# Altium PCB Board.PcbDoc (part 1 of 3)
Units mm, origin at the board's own origin, x right, y up, seen from the top; angles counter-clockwise.
Board outline 220 x 125 mm, 2 copper layers (Top Layer, Bottom Layer); 325 components, 197 nets, 1030 pads, 170 vias.
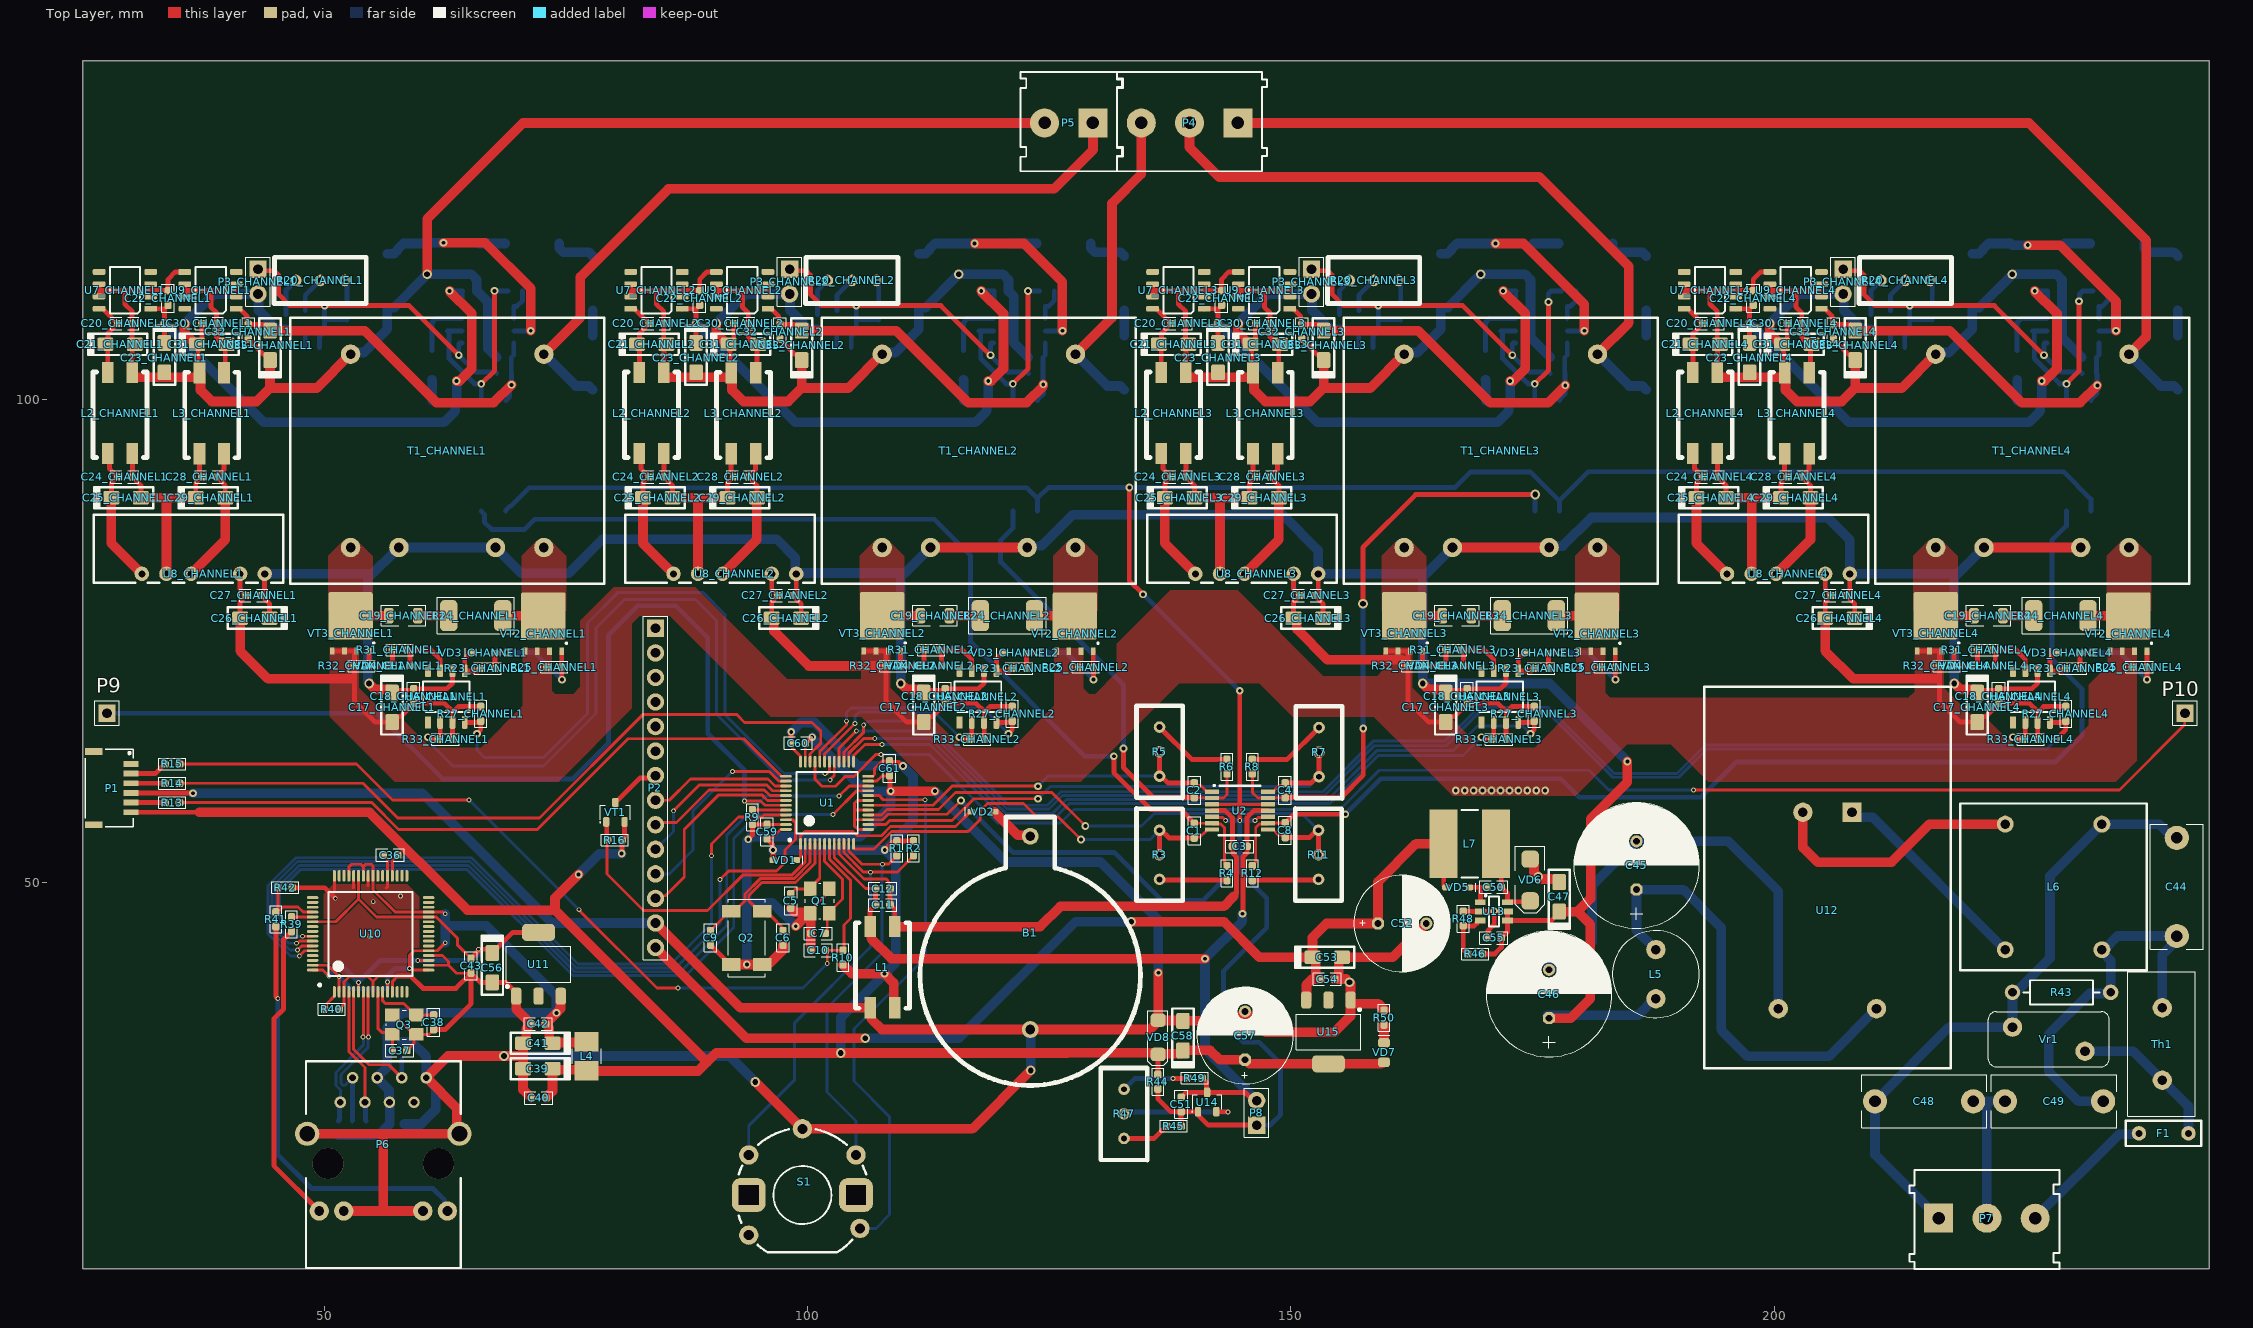
[diagram p0: Top Layer view]
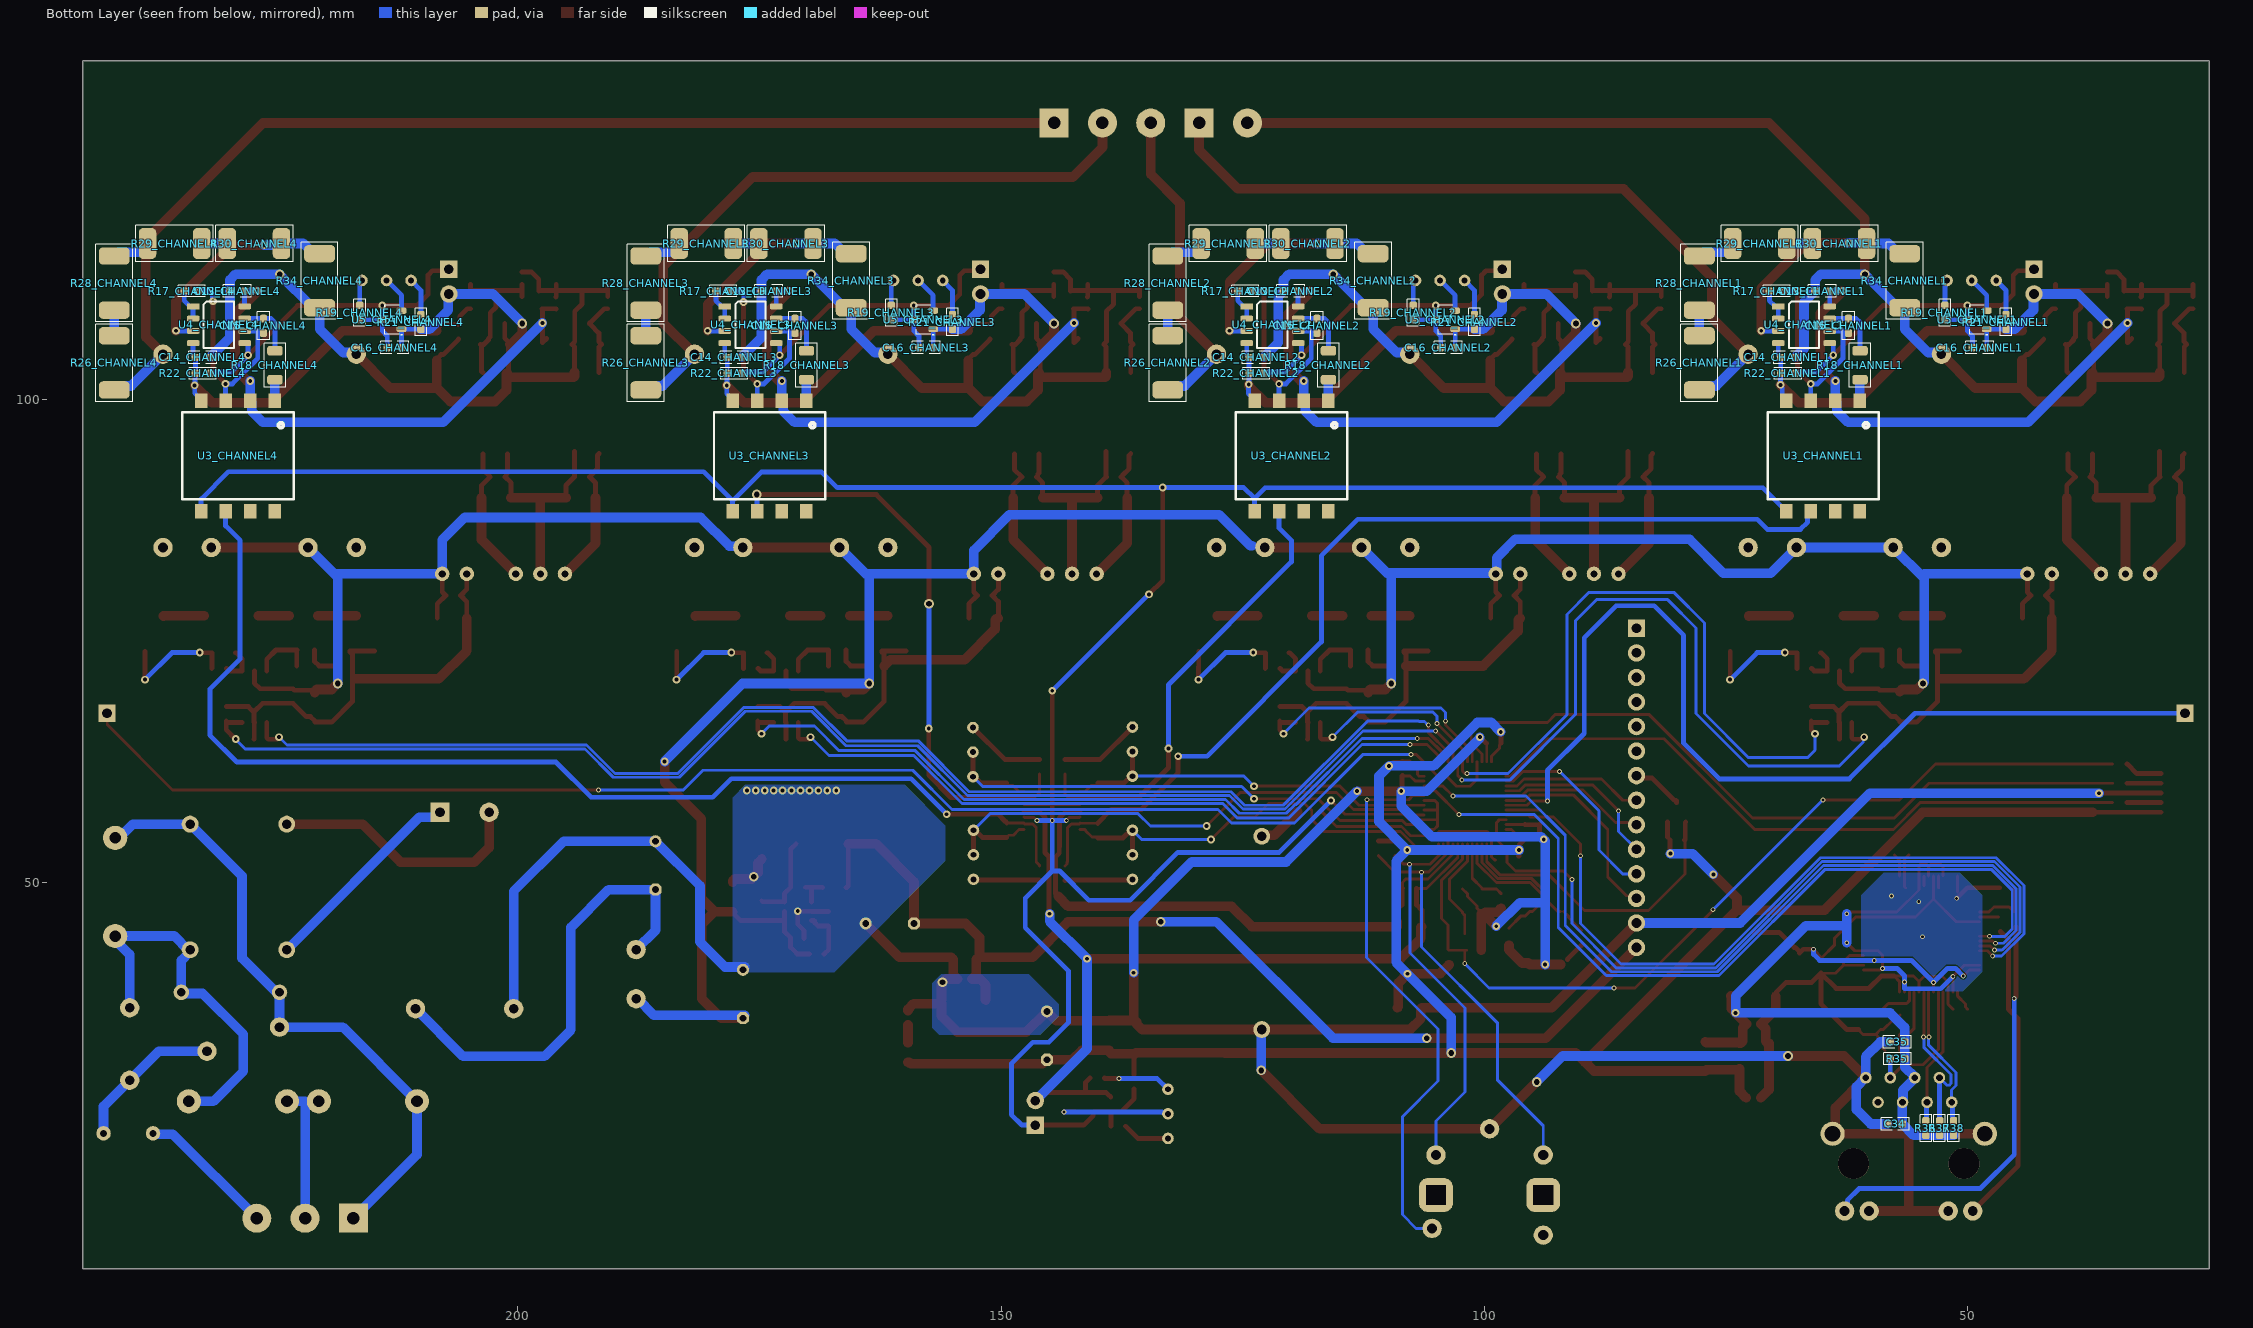
[diagram p1: Bottom Layer view, seen from below]
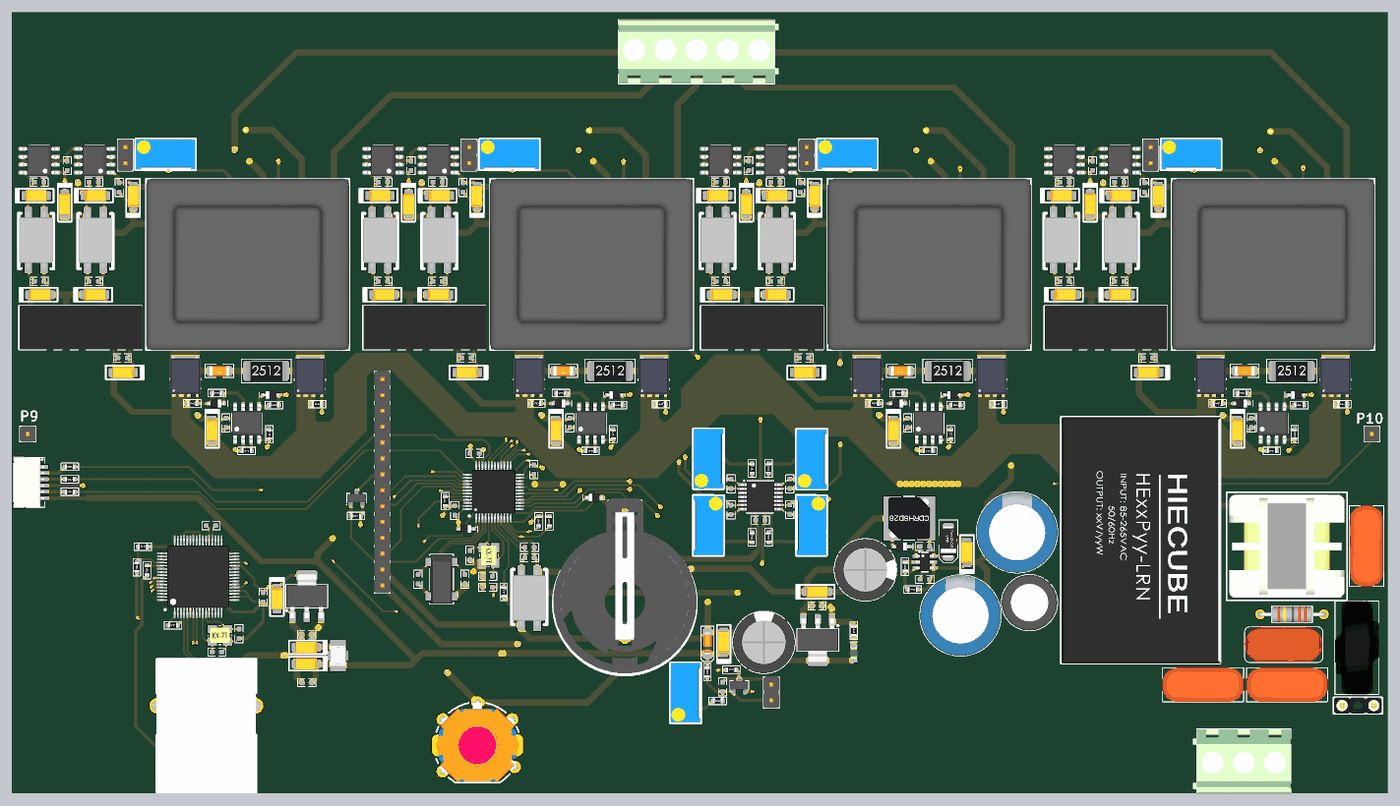
[diagram p4: 3D render of the assembled board from above, using the file's embedded part models]
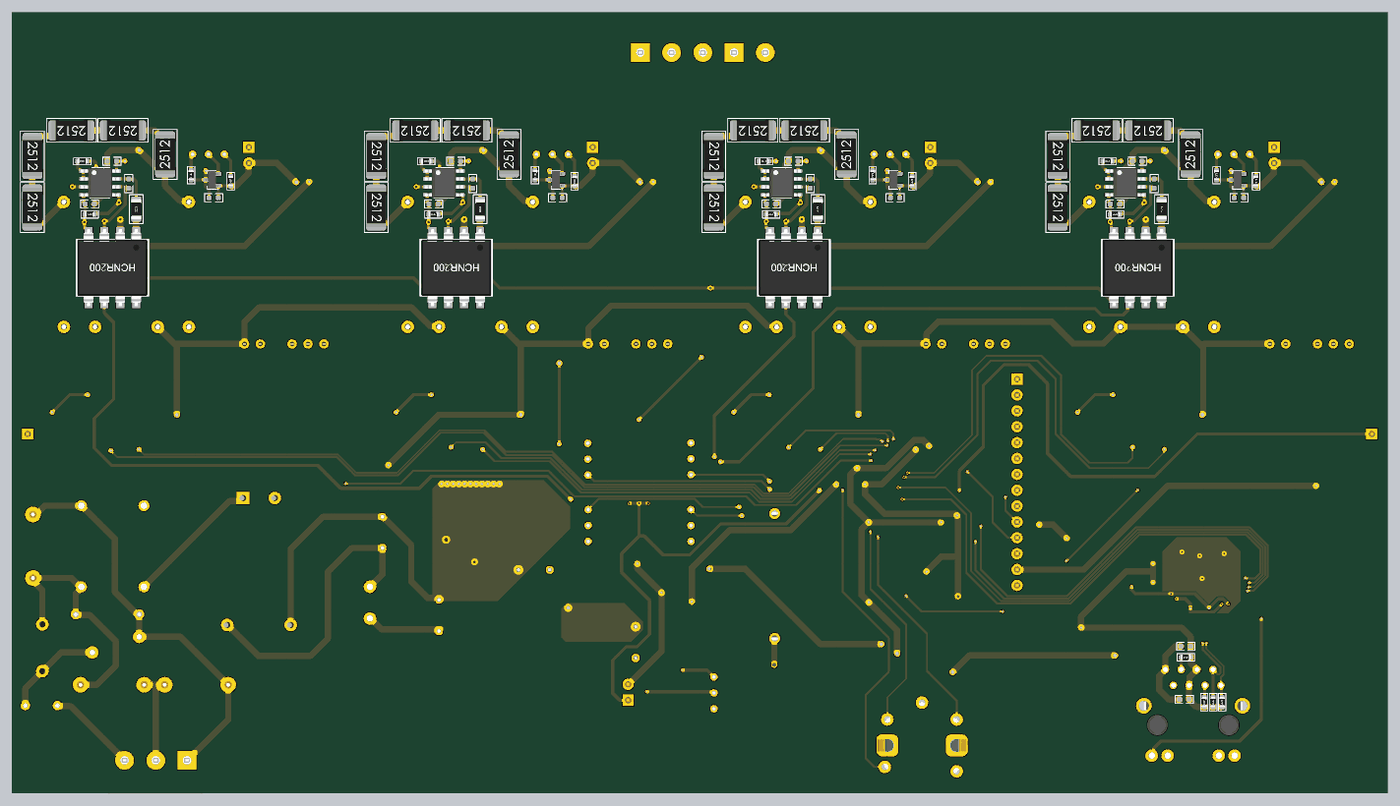
[diagram p5: 3D render of the assembled board from below, using the file's embedded part models]

## Layer stack, top to bottom
Top Solder: solder mask 0.0102, Solder Resist, Dk 3.5
Top Layer: signal copper 0.0356
Dielectric 1: dielectric 0.32, FR-4, Dk 4.8
Bottom Layer: signal copper 0.0356
Bottom Solder: solder mask 0.0102, Solder Resist, Dk 3.5

## Board outline
25,10 245,10 245,135 25,135

## Design rules (kind name [scope] priority, off if disabled: settings)
Clearance GND [InNet('GND_I.1')  Or InNet('GND_I.2') Or InNet('GND_I.3') Or InNet('GND_I.4') Or InNet('GND_I.5') Or InNet('GND_I.6') Or InNet('GND_I.7') Or InNet('GND_I.8') vs InNet('GND_I.1')  Or InNet('GND_I.2') Or InNet('GND_I.3') Or InNet('GND_I.4') Or InNet('GND_I.5') Or InNet('GND_I.6') Or InNet('GND_I.7') Or InNet('GND_I.8')] p1: gap=2 ignorepadtopadclearanceinfootprint=TRUE
Clearance GND_PWR [InNet('GND') or InNet('+5V') Or InNet('+3.3V') vs InNet('GND_I.1')  Or InNet('GND_I.2') Or InNet('GND_I.3') Or InNet('GND_I.4') Or InNet('GND_I.5') Or InNet('GND_I.6') Or InNet('GND_I.7') Or InNet('GND_I.8')] p2: gap=2 ignorepadtopadclearanceinfootprint=TRUE
Clearance [All] p3: gap=0.1 ignorepadtopadclearanceinfootprint=TRUE except(0.15: Arc-Fill Arc-Poly Arc-Region Track-Fill Track-Poly Track-Region SMDPad-Fill SMDPad-Poly SMDPad-Region THPad-Fill THPad-Poly THPad-Region Via-Fill Via-Poly Via-Region Fill-Fill Fill-Poly Fill-Region Poly-Poly Poly-Region Region-Region)
DiffPairsRouting [All] p1: maxlimit=0.3 minlimit=0.15 mostfreqgap=0.2 toplayer_minwidth=0.2 toplayer_maxwidth=0.5 toplayer_prefwidth=0.3 bottomlayer_minwidth=0.2 bottomlayer_maxwidth=0.5 bottomlayer_prefwidth=0.3 maxuncoupledlength=12.7
HoleSize [All] p1: absolutevalues=TRUE maxlimit=5 minlimit=0.025 maxpercent=80.000 minpercent=20.000
MinimumSolderMaskSliver [All] p1: minsoldermaskwidth=0.05
PolygonConnect PolygonConnect_PWR [IsVia] p1: connectstyle=Direct reliefconductorwidth=0.254 reliefentries=4 polygonreliefangle="90 Angle" airgapwidth=0.254
PolygonConnect [All] p2: connectstyle=Direct reliefconductorwidth=0.254 reliefentries=4 polygonreliefangle="90 Angle" airgapwidth=0.254
RoomDefinition CHANNEL2 [InComponentClass('CHANNEL2')] p1: confinementstyle=ConfineIn formatcopy=TRUE lockcomponents=FALSE outline 80,64 135,64 135,135 80,135
RoomDefinition CHANNEL3 [InComponentClass('CHANNEL3')] p2: confinementstyle=ConfineIn formatcopy=TRUE lockcomponents=FALSE outline 134,64 189,64 189,135 134,135
RoomDefinition CHANNEL4 [InComponentClass('CHANNEL4')] p3: confinementstyle=ConfineIn formatcopy=TRUE lockcomponents=FALSE outline 189,64 244,64 244,135 189,135
RoomDefinition CHANNEL1 [InComponentClass('CHANNEL1')] p4: confinementstyle=ConfineIn formatcopy=TRUE lockcomponents=FALSE outline 25,64 80,64 80,135 25,135
RoutingVias [All] p1: holewidth=0.4 width=0.8 viastyle="Through Hole" minholewidth=0.3 minwidth=0.5 maxholewidth=0.6 maxwidth=1
SilkToSilkClearance [All] p1: silktosilkclearance=0.1
SilkToSolderMaskClearance [IsPad] p1: minsilkscreentomaskgap=0.15 clearancetoexposedcopper=TRUE
SolderMaskExpansion [All] p1: expansion=0.15 istentingtop=FALSE
SupplyNets "Schematic Supply Nets_9" [InNet('+3.3_Eth')] p1: voltage=0.000
SupplyNets "Schematic Supply Nets_8" [InNet('+3.3V')] p2: voltage=0.000
SupplyNets "Schematic Supply Nets_7" [InNet('GND')] p3: voltage=0.000
SupplyNets "Schematic Supply Nets_6" [InNet('AVCC')] p4: voltage=0.000
SupplyNets "Schematic Supply Nets_5" [InNet('AGND')] p5: voltage=0.000
SupplyNets "Schematic Supply Nets_4" [InNet('+3.3_Bat')] p6: voltage=0.000
SupplyNets "Schematic Supply Nets_3" [InNet('+1.8_Eth')] p7: voltage=0.000
SupplyNets "Schematic Supply Nets_2" [InNet('+5V')] p8: voltage=0.000
SupplyNets "Schematic Supply Nets_1" [InNet('REF')] p9: voltage=0.000
SupplyNets "Schematic Supply Nets" [InNet('+12V')] p10: voltage=0.000
Width PWR [InNetClass('All Nets')] p1: maxlimit=1 minlimit=0.3 preferedwidth=0.5 minimp=50.000000 maximp=50.000000 favimp=50.000000
Width "High Voltage" [InNetClass('High Voltage')] p2: maxlimit=2 minlimit=0.5 preferedwidth=1 minimp=50.000000 maximp=50.000000 favimp=50.000000
Width [All] p3: maxlimit=0.5 minlimit=0.2 preferedwidth=0.3 minimp=50.000000 maximp=50.000000 favimp=50.000000
25 further rules are at their usual default settings.

## Classes and differential pairs
net class OUT[1..4]: OUT1 OUT2 OUT3 OUT4
channel class Channel: CHANNEL1 CHANNEL2 CHANNEL3 CHANNEL4
net class V[1..4]: V1 V2 V3 V4
net class U[1..4]: U1 U2 U3 U4
net class PWR: (+8V)_CHANNEL1 (+8V)_CHANNEL2 (+8V)_CHANNEL3 (+8V)_CHANNEL4 (-8V)_CHANNEL1 (-8V)_CHANNEL2 (-8V)_CHANNEL3 (-8V)_CHANNEL4 (GND)_CHANNEL1 (GND)_CHANNEL2 (GND)_CHANNEL3 (GND)_CHANNEL4 +1.8_Eth +3.3_Bat +3.3_Eth +3.3V +5V +12V AGND GND NetC19_CHANNEL1_1 NetC19_CHANNEL1_2 NetC19_CHANNEL2_1 NetC19_CHANNEL2_2 NetC19_CHANNEL3_1 NetC19_CHANNEL3_2 NetC19_CHANNEL4_1 NetC19_CHANNEL4_2 NetC20_CHANNEL1_2 NetC20_CHANNEL2_2 NetC20_CHANNEL3_2 NetC20_CHANNEL4_2 NetC24_CHANNEL1_1 NetC24_CHANNEL1_2 NetC24_CHANNEL2_1 NetC24_CHANNEL2_2 NetC24_CHANNEL3_1 NetC24_CHANNEL3_2 NetC24_CHANNEL4_1 NetC24_CHANNEL4_2 NetC28_CHANNEL1_1 NetC28_CHANNEL2_1 NetC28_CHANNEL3_1 NetC28_CHANNEL4_1 NetC30_CHANNEL1_1 NetC30_CHANNEL2_1 NetC30_CHANNEL3_1 NetC30_CHANNEL4_1 NetC45_1 NetC50_1 NetC50_2 NetR23_CHANNEL1_2 NetR23_CHANNEL2_2 NetR23_CHANNEL3_2 NetR23_CHANNEL4_2 NetR24_CHANNEL1_2 NetR24_CHANNEL2_2 NetR24_CHANNEL3_2 NetR24_CHANNEL4_2 NetR31_CHANNEL1_2 NetR31_CHANNEL2_2 NetR31_CHANNEL3_2 NetR31_CHANNEL4_2 NetR45_1 NetR46_1 NetR47_1 NetR47_2 NetR50_2 OUT1 OUT2 OUT3 OUT4 REF
net class PWM_RIGHT[1..4]: PWM_RIGHT1 PWM_RIGHT2 PWM_RIGHT3 PWM_RIGHT4
net class PWM_LEFT[1..4]: PWM_LEFT1 PWM_LEFT2 PWM_LEFT3 PWM_LEFT4
net class "High Voltage": NetC44_1 NetC44_2 NetC48_1 NetF1_1 NetF1_2 NetL6_3 NetL6_4
component class POWER: B1 C44 C45 C46 C47 C48 C49 C50 C51 C52 C53 C54 C55 C57 C58 F1 L5 L6 L7 P7 P8 R43 R44 R45 R46 R47 R48 R49 R50 Th1 U12 U13 U14 U15 VD5 VD6 VD7 VD8 Vr1
component class Main: C1 C2 C3 C4 C5 C6 C7 C8 C9 C10 C11 C12 C59 C60 C61 L1 P1 P2 P4 P5 P9 P10 Q1 Q2 R1 R2 R3 R4 R5 R6 R7 R8 R9 R10 R11 R12 R13 R14 R15 R16 S1 U1 U2 VD1 VD2 VT1
component class LAN: C34 C35 C36 C37 C38 C39 C40 C41 C42 C43 C56 L4 P6 Q3 R35 R36 R37 R38 R39 R40 R41 R42 U10 U11
component class CHANNEL4: C13_CHANNEL4 C14_CHANNEL4 C15_CHANNEL4 C16_CHANNEL4 C17_CHANNEL4 C18_CHANNEL4 C19_CHANNEL4 C20_CHANNEL4 C21_CHANNEL4 C22_CHANNEL4 C23_CHANNEL4 C24_CHANNEL4 C25_CHANNEL4 C26_CHANNEL4 C27_CHANNEL4 C28_CHANNEL4 C29_CHANNEL4 C30_CHANNEL4 C31_CHANNEL4 C32_CHANNEL4 C33_CHANNEL4 L2_CHANNEL4 L3_CHANNEL4 P3_CHANNEL4 R17_CHANNEL4 R18_CHANNEL4 R19_CHANNEL4 R20_CHANNEL4 R21_CHANNEL4 R22_CHANNEL4 R23_CHANNEL4 R24_CHANNEL4 R25_CHANNEL4 R26_CHANNEL4 R27_CHANNEL4 R28_CHANNEL4 R29_CHANNEL4 R30_CHANNEL4 R31_CHANNEL4 R32_CHANNEL4 R33_CHANNEL4 R34_CHANNEL4 T1_CHANNEL4 U3_CHANNEL4 U4_CHANNEL4 U5_CHANNEL4 U6_CHANNEL4 U7_CHANNEL4 U8_CHANNEL4 U9_CHANNEL4 VD3_CHANNEL4 VD4_CHANNEL4 VT2_CHANNEL4 VT3_CHANNEL4
component class CHANNEL3: C13_CHANNEL3 C14_CHANNEL3 C15_CHANNEL3 C16_CHANNEL3 C17_CHANNEL3 C18_CHANNEL3 C19_CHANNEL3 C20_CHANNEL3 C21_CHANNEL3 C22_CHANNEL3 C23_CHANNEL3 C24_CHANNEL3 C25_CHANNEL3 C26_CHANNEL3 C27_CHANNEL3 C28_CHANNEL3 C29_CHANNEL3 C30_CHANNEL3 C31_CHANNEL3 C32_CHANNEL3 C33_CHANNEL3 L2_CHANNEL3 L3_CHANNEL3 P3_CHANNEL3 R17_CHANNEL3 R18_CHANNEL3 R19_CHANNEL3 R20_CHANNEL3 R21_CHANNEL3 R22_CHANNEL3 R23_CHANNEL3 R24_CHANNEL3 R25_CHANNEL3 R26_CHANNEL3 R27_CHANNEL3 R28_CHANNEL3 R29_CHANNEL3 R30_CHANNEL3 R31_CHANNEL3 R32_CHANNEL3 R33_CHANNEL3 R34_CHANNEL3 T1_CHANNEL3 U3_CHANNEL3 U4_CHANNEL3 U5_CHANNEL3 U6_CHANNEL3 U7_CHANNEL3 U8_CHANNEL3 U9_CHANNEL3 VD3_CHANNEL3 VD4_CHANNEL3 VT2_CHANNEL3 VT3_CHANNEL3
component class CHANNEL2: C13_CHANNEL2 C14_CHANNEL2 C15_CHANNEL2 C16_CHANNEL2 C17_CHANNEL2 C18_CHANNEL2 C19_CHANNEL2 C20_CHANNEL2 C21_CHANNEL2 C22_CHANNEL2 C23_CHANNEL2 C24_CHANNEL2 C25_CHANNEL2 C26_CHANNEL2 C27_CHANNEL2 C28_CHANNEL2 C29_CHANNEL2 C30_CHANNEL2 C31_CHANNEL2 C32_CHANNEL2 C33_CHANNEL2 L2_CHANNEL2 L3_CHANNEL2 P3_CHANNEL2 R17_CHANNEL2 R18_CHANNEL2 R19_CHANNEL2 R20_CHANNEL2 R21_CHANNEL2 R22_CHANNEL2 R23_CHANNEL2 R24_CHANNEL2 R25_CHANNEL2 R26_CHANNEL2 R27_CHANNEL2 R28_CHANNEL2 R29_CHANNEL2 R30_CHANNEL2 R31_CHANNEL2 R32_CHANNEL2 R33_CHANNEL2 R34_CHANNEL2 T1_CHANNEL2 U3_CHANNEL2 U4_CHANNEL2 U5_CHANNEL2 U6_CHANNEL2 U7_CHANNEL2 U8_CHANNEL2 U9_CHANNEL2 VD3_CHANNEL2 VD4_CHANNEL2 VT2_CHANNEL2 VT3_CHANNEL2
component class CHANNEL1: C13_CHANNEL1 C14_CHANNEL1 C15_CHANNEL1 C16_CHANNEL1 C17_CHANNEL1 C18_CHANNEL1 C19_CHANNEL1 C20_CHANNEL1 C21_CHANNEL1 C22_CHANNEL1 C23_CHANNEL1 C24_CHANNEL1 C25_CHANNEL1 C26_CHANNEL1 C27_CHANNEL1 C28_CHANNEL1 C29_CHANNEL1 C30_CHANNEL1 C31_CHANNEL1 C32_CHANNEL1 C33_CHANNEL1 L2_CHANNEL1 L3_CHANNEL1 P3_CHANNEL1 R17_CHANNEL1 R18_CHANNEL1 R19_CHANNEL1 R20_CHANNEL1 R21_CHANNEL1 R22_CHANNEL1 R23_CHANNEL1 R24_CHANNEL1 R25_CHANNEL1 R26_CHANNEL1 R27_CHANNEL1 R28_CHANNEL1 R29_CHANNEL1 R30_CHANNEL1 R31_CHANNEL1 R32_CHANNEL1 R33_CHANNEL1 R34_CHANNEL1 T1_CHANNEL1 U3_CHANNEL1 U4_CHANNEL1 U5_CHANNEL1 U6_CHANNEL1 U7_CHANNEL1 U8_CHANNEL1 U9_CHANNEL1 VD3_CHANNEL1 VD4_CHANNEL1 VT2_CHANNEL1 VT3_CHANNEL1
differential pair TX: +TX_P -TX_N
differential pair RX: +RX_P -RX_N

## Components (designator, comment, footprint, x,y, rotation, side; value= is the part's Value field where it differs from the comment)
B1 "3.3V" BH810 123.025,54.775 r0 top
C1 "15p" C0603(1608) 140,55.35 r270 top
C2 "15p" C0603(1608) 140,59.525 r90 top
C3 "0.1u" C0603(1608) 144.7,53.725 r180 top
C4 "15p" C0603(1608) 149.4,59.525 r90 top
C5 "10p" C0603(1608) 98.25,48.075 r270 top
C6 "10p" C0603(1608) 97.45,44.25 r270 top
C7 "10p" C0603(1608) 101.075,44.725 r180 top
C8 "15p" C0603(1608) 149.4,55.4 r270 top
C9 "10p" C0603(1608) 89.95,44.25 r270 top
C10 "0.1u" C0603(1608) 101.075,42.975 r0 top
C11 "0.1u" C0603(1608) 107.775,47.675 r0 top
C12 "1u" C0603(1608) 107.775,49.35 r0 top
C13_CHANNEL1 "0.1u" C0603(1608) 65.024,111.172 r180 bottom (schematic designator C13)
C13_CHANNEL2 "0.1u" C0603(1608) 120.024,111.172 r180 bottom (schematic designator C13)
C13_CHANNEL3 "0.1u" C0603(1608) 174.024,111.172 r180 bottom (schematic designator C13)
C13_CHANNEL4 "0.1u" C0603(1608) 229.024,111.172 r180 bottom (schematic designator C13)
C14_CHANNEL1 "0.1u" C0603(1608) 68.58,104.314 r180 bottom (schematic designator C14)
C14_CHANNEL2 "0.1u" C0603(1608) 123.58,104.314 r180 bottom (schematic designator C14)
C14_CHANNEL3 "0.1u" C0603(1608) 177.58,104.314 r180 bottom (schematic designator C14)
C14_CHANNEL4 "0.1u" C0603(1608) 232.58,104.314 r180 bottom (schematic designator C14)
C15_CHANNEL1 "15p" C0603(1608) 62.317,107.577 r270 bottom (schematic designator C15)
C15_CHANNEL2 "15p" C0603(1608) 117.317,107.577 r270 bottom (schematic designator C15)
C15_CHANNEL3 "15p" C0603(1608) 171.317,107.577 r270 bottom (schematic designator C15)
C15_CHANNEL4 "15p" C0603(1608) 226.317,107.577 r270 bottom (schematic designator C15)
C16_CHANNEL1 "0.1u" C0603(1608) 48.75,105.325 r180 bottom (schematic designator C16)
C16_CHANNEL2 "0.1u" C0603(1608) 103.75,105.325 r180 bottom (schematic designator C16)
C16_CHANNEL3 "0.1u" C0603(1608) 157.75,105.325 r180 bottom (schematic designator C16)
C16_CHANNEL4 "0.1u" C0603(1608) 212.75,105.325 r180 bottom (schematic designator C16)
C17_CHANNEL1 "10u" "EL Case A (3216-18)" 57,68.1 r270 top (schematic designator C17)
C17_CHANNEL2 "10u" "EL Case A (3216-18)" 112,68.1 r270 top (schematic designator C17)
C17_CHANNEL3 "10u" "EL Case A (3216-18)" 166,68.1 r270 top (schematic designator C17)
C17_CHANNEL4 "10u" "EL Case A (3216-18)" 221,68.1 r270 top (schematic designator C17)
C18_CHANNEL1 "0.1u" C0603(1608) 59.225,69.275 r270 top (schematic designator C18)
C18_CHANNEL2 "0.1u" C0603(1608) 114.225,69.275 r270 top (schematic designator C18)
C18_CHANNEL3 "0.1u" C0603(1608) 168.225,69.275 r270 top (schematic designator C18)
C18_CHANNEL4 "0.1u" C0603(1608) 223.225,69.275 r270 top (schematic designator C18)
C19_CHANNEL1 "0.1u" C1206(3216) 58.166,77.597 r180 top (schematic designator C19)
C19_CHANNEL2 "0.1u" C1206(3216) 113.166,77.597 r180 top (schematic designator C19)
C19_CHANNEL3 "0.1u" C1206(3216) 167.166,77.597 r180 top (schematic designator C19)
C19_CHANNEL4 "0.1u" C1206(3216) 222.166,77.597 r180 top (schematic designator C19)
C20_CHANNEL1 "0.1u" C0603(1608) 29.353,107.823 r180 top (schematic designator C20)
C20_CHANNEL2 "0.1u" C0603(1608) 84.353,107.823 r180 top (schematic designator C20)
C20_CHANNEL3 "0.1u" C0603(1608) 138.353,107.823 r180 top (schematic designator C20)
C20_CHANNEL4 "0.1u" C0603(1608) 193.353,107.823 r180 top (schematic designator C20)
C21_CHANNEL1 "33u" "EL Case A (3216-18)" 28.853,105.664 r0 top (schematic designator C21)
C21_CHANNEL2 "33u" "EL Case A (3216-18)" 83.853,105.664 r0 top (schematic designator C21)
C21_CHANNEL3 "33u" "EL Case A (3216-18)" 137.853,105.664 r0 top (schematic designator C21)
C21_CHANNEL4 "33u" "EL Case A (3216-18)" 192.853,105.664 r0 top (schematic designator C21)
C22_CHANNEL1 "0.1u" C0603(1608) 33.825,110.45 r270 top (schematic designator C22)
C22_CHANNEL2 "0.1u" C0603(1608) 88.825,110.45 r270 top (schematic designator C22)
C22_CHANNEL3 "0.1u" C0603(1608) 142.825,110.45 r270 top (schematic designator C22)
C22_CHANNEL4 "0.1u" C0603(1608) 197.825,110.45 r270 top (schematic designator C22)
C23_CHANNEL1 "33u" "EL Case A (3216-18)" 33.45,104.3 r270 top (schematic designator C23)
C23_CHANNEL2 "33u" "EL Case A (3216-18)" 88.45,104.3 r270 top (schematic designator C23)
C23_CHANNEL3 "33u" "EL Case A (3216-18)" 142.45,104.3 r270 top (schematic designator C23)
C23_CHANNEL4 "33u" "EL Case A (3216-18)" 197.45,104.3 r270 top (schematic designator C23)
C24_CHANNEL1 "0.1u" C0603(1608) 29.353,91.948 r180 top (schematic designator C24)
C24_CHANNEL2 "0.1u" C0603(1608) 84.353,91.948 r180 top (schematic designator C24)
C24_CHANNEL3 "0.1u" C0603(1608) 138.353,91.948 r180 top (schematic designator C24)
C24_CHANNEL4 "0.1u" C0603(1608) 193.353,91.948 r180 top (schematic designator C24)
C25_CHANNEL1 "33u" "EL Case A (3216-18)" 29.48,89.789 r0 top (schematic designator C25)
C25_CHANNEL2 "33u" "EL Case A (3216-18)" 84.48,89.789 r0 top (schematic designator C25)
C25_CHANNEL3 "33u" "EL Case A (3216-18)" 138.48,89.789 r0 top (schematic designator C25)
C25_CHANNEL4 "33u" "EL Case A (3216-18)" 193.48,89.789 r0 top (schematic designator C25)
C26_CHANNEL1 "33u" "EL Case A (3216-18)" 42.799,77.343 r180 top (schematic designator C26)
C26_CHANNEL2 "33u" "EL Case A (3216-18)" 97.799,77.343 r180 top (schematic designator C26)
C26_CHANNEL3 "33u" "EL Case A (3216-18)" 151.799,77.343 r180 top (schematic designator C26)
C26_CHANNEL4 "33u" "EL Case A (3216-18)" 206.799,77.343 r180 top (schematic designator C26)
C27_CHANNEL1 "0.1u" C0603(1608) 42.678,79.681 r0 top (schematic designator C27)
C27_CHANNEL2 "0.1u" C0603(1608) 97.678,79.681 r0 top (schematic designator C27)
C27_CHANNEL3 "0.1u" C0603(1608) 151.678,79.681 r0 top (schematic designator C27)
C27_CHANNEL4 "0.1u" C0603(1608) 206.678,79.681 r0 top (schematic designator C27)
C28_CHANNEL1 "0.1u" C0603(1608) 38.092,91.948 r180 top (schematic designator C28)
C28_CHANNEL2 "0.1u" C0603(1608) 93.092,91.948 r180 top (schematic designator C28)
C28_CHANNEL3 "0.1u" C0603(1608) 147.092,91.948 r180 top (schematic designator C28)
C28_CHANNEL4 "0.1u" C0603(1608) 202.092,91.948 r180 top (schematic designator C28)
C29_CHANNEL1 "33u" "EL Case A (3216-18)" 38.219,89.789 r0 top (schematic designator C29)
C29_CHANNEL2 "33u" "EL Case A (3216-18)" 93.219,89.789 r0 top (schematic designator C29)
C29_CHANNEL3 "33u" "EL Case A (3216-18)" 147.219,89.789 r0 top (schematic designator C29)
C29_CHANNEL4 "33u" "EL Case A (3216-18)" 202.219,89.789 r0 top (schematic designator C29)
C30_CHANNEL1 "0.1u" C0603(1608) 38.092,107.823 r180 top (schematic designator C30)
C30_CHANNEL2 "0.1u" C0603(1608) 93.092,107.823 r180 top (schematic designator C30)
C30_CHANNEL3 "0.1u" C0603(1608) 147.092,107.823 r180 top (schematic designator C30)
C30_CHANNEL4 "0.1u" C0603(1608) 202.092,107.823 r180 top (schematic designator C30)
C31_CHANNEL1 "33u" "EL Case A (3216-18)" 38.342,105.664 r0 top (schematic designator C31)
C31_CHANNEL2 "33u" "EL Case A (3216-18)" 93.342,105.664 r0 top (schematic designator C31)
C31_CHANNEL3 "33u" "EL Case A (3216-18)" 147.342,105.664 r0 top (schematic designator C31)
C31_CHANNEL4 "33u" "EL Case A (3216-18)" 202.342,105.664 r0 top (schematic designator C31)
C32_CHANNEL1 "0.1u" C0603(1608) 42.125,106.975 r270 top (schematic designator C32)
C32_CHANNEL2 "0.1u" C0603(1608) 97.125,106.975 r270 top (schematic designator C32)
C32_CHANNEL3 "0.1u" C0603(1608) 151.125,106.975 r270 top (schematic designator C32)
C32_CHANNEL4 "0.1u" C0603(1608) 206.125,106.975 r270 top (schematic designator C32)
C33_CHANNEL1 "33u" "EL Case A (3216-18)" 44.375,105.55 r90 top (schematic designator C33)
C33_CHANNEL2 "33u" "EL Case A (3216-18)" 99.375,105.55 r90 top (schematic designator C33)
C33_CHANNEL3 "33u" "EL Case A (3216-18)" 153.375,105.55 r90 top (schematic designator C33)
C33_CHANNEL4 "33u" "EL Case A (3216-18)" 208.375,105.55 r90 top (schematic designator C33)
C34 "0.1u" C0603(1608) 57.5,25 r180 bottom
C35 "0.1u" C0603(1608) 57.25,33.5 r180 bottom
C36 "1u" C0603(1608) 56.825,52.825 r0 top
C37 "22p" C0603(1608) 57.775,32.6 r180 top
C38 "22p" C0603(1608) 61.3,35.525 r90 top
C39 "33u" "EL Case A (3216-18)" 72.075,30.725 r180 top
C40 "0.1u" C0603(1608) 72.15,27.7 r0 top
C41 "33u" "EL Case A (3216-18)" 72.075,33.35 r180 top
C42 "0.1u" C0603(1608) 72.125,35.35 r0 top
C43 "0.1u" C0603(1608) 65.175,41.375 r90 top
C44 "0.33u" "MER 13x5.5 h10 R10.16" 241.65,49.525 r270 top
C45 "2200u" El-d13-h25-F5-0.6 185.75,51.75 r270 top
C46 "2200u" El-d13-h25-F5-0.6 176.7,38.45 r270 top
C47 "100u" "EL Case A (3216-18)" 177.75,48.5 r90 top
C48 "2.2n" "MER 13x5.5 h10 R10.16" 215.5,27.35 r180 top
C49 "2.2n" "MER 13x5.5 h10 R10.16" 228.95,27.35 r0 top
C50 "0.1u" C0603(1608) 171,49.5 r0 top
C51 "0.1u" C0603(1608) 138.65,27.025 r270 top
C52 "1000u" El-d10-h16-F5-0.6 161.5,45.75 r180 top
C53 "10u" "EL Case A (3216-18)" 153.75,42.25 r0 top
C54 "1u" C0603(1608) 153.75,40 r0 top
C55 "1u" C0603(1608) 171,44.25 r180 top
C56 "33u" "EL Case A (3216-18)" 67.375,41.175 r270 top
C57 "1000u" El-d10-h16-F5-0.6 145.25,34.15 r270 top
C58 "10u" "EL Case A (3216-18)" 138.825,34.15 r90 top
C59 "0.1u" C0603(1608) 95.8,55.25 r270 top
C60 "0.1u" C0603(1608) 99,64.4 r180 top
C61 "0.1u" C0603(1608) 108.475,61.8 r90 top
F1 "1A" "562 Series" 240.275,24.025 r0 top
L1 "DR331-513AE" DR331 106.46,37.525 r90 top
L2_CHANNEL1 "DR331-513AE" DR331 30.123,102.261 r270 top (schematic designator L2)
L2_CHANNEL2 "DR331-513AE" DR331 85.123,102.261 r270 top (schematic designator L2)
L2_CHANNEL3 "DR331-513AE" DR331 139.123,102.261 r270 top (schematic designator L2)
L2_CHANNEL4 "DR331-513AE" DR331 194.123,102.261 r270 top (schematic designator L2)
L3_CHANNEL1 "DR331-513AE" DR331 39.612,102.235 r270 top (schematic designator L3)
L3_CHANNEL2 "DR331-513AE" DR331 94.612,102.235 r270 top (schematic designator L3)
L3_CHANNEL3 "DR331-513AE" DR331 148.612,102.235 r270 top (schematic designator L3)
L3_CHANNEL4 "DR331-513AE" DR331 203.612,102.235 r270 top (schematic designator L3)
L4 "10u" LQH32CN 77.125,32 r90 top
L5 "3.3u/2A" DR-CW8A 187.75,40.5 r270 top
L6 "PMCU-0330" PMCU-0330 228.9,49.525 r180 top
L7 "22u" CDRH6D28 168.5,54 r180 top
P1 "SM06B-SRSS-TB" SM06B-SRSS-TB 30,59.75 r90 top
P2 "PLS-14" PLS-14 84.25,59.77 r270 top
P3_CHANNEL1 "PLS-2" PLS-2 43.125,112.15 r270 top (schematic designator P3)
P3_CHANNEL2 "PLS-2" PLS-2 98.125,112.15 r270 top (schematic designator P3)
P3_CHANNEL3 "PLS-2" PLS-2 152.125,112.15 r270 top (schematic designator P3)
P3_CHANNEL4 "PLS-2" PLS-2 207.125,112.15 r270 top (schematic designator P3)
P4 "DG128-5.0-03P" DG128-5.0-03P 139.509,128.571 r180 top
P5 "DG128-5.0-02P" DG128-5.0-02P 127.009,128.571 r180 top
P6 "HR911105A" HR911105A 60.535,29.79 r180 top
P7 "DG128-5.0-03P" DG128-5.0-03P 222,15.25 r0 top
P8 "PLS-2" PLS-2 146.45,26.15 r90 top
P9 "PLS-1" PLS-1 27.5,67.5 r0 top
P10 "PLS-1" PLS-1 242.5,67.5 r0 top
Q1 "8MHz" KX-7T 101.25,48.075 r270 top
Q2 "32.768k" KX-327S 93.7,44.25 r270 top
Q3 "30 MHz" KX-7T 58.25,35.275 r0 top
R1 "10k" R0603 109.225,53.525 r90 top
R2 "10k" R0603 110.95,53.525 r90 top
R3 "50k" "T910W (3296W)" 136.4,52.85 r90 top
R4 "180k" R0603 143.375,50.95 r270 top
R5 "50k" "T910W (3296W)" 136.4,63.525 r270 top
R6 "180k" R0603 143.375,61.975 r90 top
R7 "50k" "T910W (3296W)" 152.9,63.475 r270 top
R8 "180k" R0603 146,61.975 r90 top
R9 "10k" R0603 94.275,56.75 r270 top
R10 "10k" R0603 103.65,42.225 r270 top
R11 "50k" "T910W (3296W)" 152.85,52.85 r90 top
R12 "180k" R0603 146,50.95 r270 top
R13 "22" R0603 34.25,58.25 r0 top
R14 "22" R0603 34.25,60.25 r0 top
R15 "22" R0603 34.25,62.25 r0 top
R16 "10k" R0603 80.025,54.375 r0 top
R17_CHANNEL1 "180k" R0603 69.75,111.172 r180 bottom (schematic designator R17)
R17_CHANNEL2 "180k" R0603 124.75,111.172 r180 bottom (schematic designator R17)
R17_CHANNEL3 "180k" R0603 178.75,111.172 r180 bottom (schematic designator R17)
R17_CHANNEL4 "180k" R0603 233.75,111.172 r180 bottom (schematic designator R17)
R18_CHANNEL1 "680" R1206 61.125,103.5 r270 bottom (schematic designator R18)
R18_CHANNEL2 "680" R1206 116.125,103.5 r270 bottom (schematic designator R18)
R18_CHANNEL3 "680" R1206 170.125,103.5 r270 bottom (schematic designator R18)
R18_CHANNEL4 "680" R1206 225.125,103.5 r270 bottom (schematic designator R18)
R19_CHANNEL1 "120k" R0603 52.35,108.95 r270 bottom (schematic designator R19)
R19_CHANNEL2 "120k" R0603 107.35,108.95 r270 bottom (schematic designator R19)
R19_CHANNEL3 "120k" R0603 161.35,108.95 r270 bottom (schematic designator R19)
R19_CHANNEL4 "120k" R0603 216.35,108.95 r270 bottom (schematic designator R19)
R20_CHANNEL1 "50k" "T910W (3296W)" 49.575,112.275 r180 top (schematic designator R20)
R20_CHANNEL2 "50k" "T910W (3296W)" 104.575,112.275 r180 top (schematic designator R20)
R20_CHANNEL3 "50k" "T910W (3296W)" 158.575,112.275 r180 top (schematic designator R20)
R20_CHANNEL4 "50k" "T910W (3296W)" 213.575,112.275 r180 top (schematic designator R20)
R21_CHANNEL1 "120k" R0603 46.025,107.975 r90 bottom (schematic designator R21)
R21_CHANNEL2 "120k" R0603 101.025,107.975 r90 bottom (schematic designator R21)
R21_CHANNEL3 "120k" R0603 155.025,107.975 r90 bottom (schematic designator R21)
R21_CHANNEL4 "120k" R0603 210.025,107.975 r90 bottom (schematic designator R21)
R22_CHANNEL1 "100" R0603 68.58,102.663 r0 bottom (schematic designator R22)
R22_CHANNEL2 "100" R0603 123.58,102.663 r0 bottom (schematic designator R22)
R22_CHANNEL3 "100" R0603 177.58,102.663 r0 bottom (schematic designator R22)
R22_CHANNEL4 "100" R0603 232.58,102.663 r0 bottom (schematic designator R22)
R23_CHANNEL1 "10" R0603 66.907,72.131 r0 top (schematic designator R23)
R23_CHANNEL2 "10" R0603 121.907,72.131 r0 top (schematic designator R23)
R23_CHANNEL3 "10" R0603 175.907,72.131 r0 top (schematic designator R23)
R23_CHANNEL4 "10" R0603 230.907,72.131 r0 top (schematic designator R23)
R24_CHANNEL1 "56" R2512 65.659,77.597 r0 top (schematic designator R24)
R24_CHANNEL2 "56" R2512 120.659,77.597 r0 top (schematic designator R24)
R24_CHANNEL3 "56" R2512 174.659,77.597 r0 top (schematic designator R24)
R24_CHANNEL4 "56" R2512 229.659,77.597 r0 top (schematic designator R24)
R25_CHANNEL1 "10k" R0603 73.787,72.263 r0 top (schematic designator R25)
R25_CHANNEL2 "10k" R0603 128.787,72.263 r0 top (schematic designator R25)
R25_CHANNEL3 "10k" R0603 182.787,72.263 r0 top (schematic designator R25)
R25_CHANNEL4 "10k" R0603 237.787,72.263 r0 top (schematic designator R25)
R26_CHANNEL1 "2.7M" R2512 77.75,103.75 r270 bottom (schematic designator R26)
R26_CHANNEL2 "2.7M" R2512 132.75,103.75 r270 bottom (schematic designator R26)
R26_CHANNEL3 "2.7M" R2512 186.75,103.75 r270 bottom (schematic designator R26)
R26_CHANNEL4 "2.7M" R2512 241.75,103.75 r270 bottom (schematic designator R26)
R27_CHANNEL1 "150k" R0603 66.167,67.437 r90 top (schematic designator R27)
R27_CHANNEL2 "150k" R0603 121.167,67.437 r90 top (schematic designator R27)
R27_CHANNEL3 "150k" R0603 175.167,67.437 r90 top (schematic designator R27)
R27_CHANNEL4 "150k" R0603 230.167,67.437 r90 top (schematic designator R27)
R28_CHANNEL1 "2.7M" R2512 77.75,112 r270 bottom (schematic designator R28)
R28_CHANNEL2 "2.7M" R2512 132.75,112 r270 bottom (schematic designator R28)
R28_CHANNEL3 "2.7M" R2512 186.75,112 r270 bottom (schematic designator R28)
R28_CHANNEL4 "2.7M" R2512 241.75,112 r270 bottom (schematic designator R28)
R29_CHANNEL1 "2.7M" R2512 71.5,116.098 r0 bottom (schematic designator R29)
R29_CHANNEL2 "2.7M" R2512 126.5,116.098 r0 bottom (schematic designator R29)
R29_CHANNEL3 "2.7M" R2512 180.5,116.098 r0 bottom (schematic designator R29)
R29_CHANNEL4 "2.7M" R2512 235.5,116.098 r0 bottom (schematic designator R29)
R30_CHANNEL1 "2.7M" R2512 63.25,116.098 r0 bottom (schematic designator R30)
R30_CHANNEL2 "2.7M" R2512 118.25,116.098 r0 bottom (schematic designator R30)
R30_CHANNEL3 "2.7M" R2512 172.25,116.098 r0 bottom (schematic designator R30)
R30_CHANNEL4 "2.7M" R2512 227.25,116.098 r0 bottom (schematic designator R30)
R31_CHANNEL1 "10" R0603 57.785,74.041 r180 top (schematic designator R31)
R31_CHANNEL2 "10" R0603 112.785,74.041 r180 top (schematic designator R31)
R31_CHANNEL3 "10" R0603 166.785,74.041 r180 top (schematic designator R31)
R31_CHANNEL4 "10" R0603 221.785,74.041 r180 top (schematic designator R31)
R32_CHANNEL1 "10k" R0603 53.848,72.39 r0 top (schematic designator R32)
R32_CHANNEL2 "10k" R0603 108.848,72.39 r0 top (schematic designator R32)
R32_CHANNEL3 "10k" R0603 162.848,72.39 r0 top (schematic designator R32)
R32_CHANNEL4 "10k" R0603 217.848,72.39 r0 top (schematic designator R32)
R33_CHANNEL1 "150k" R0603 62.525,64.8 r0 top (schematic designator R33)
R33_CHANNEL2 "150k" R0603 117.525,64.8 r0 top (schematic designator R33)
R33_CHANNEL3 "150k" R0603 171.525,64.8 r0 top (schematic designator R33)
R33_CHANNEL4 "150k" R0603 226.525,64.8 r0 top (schematic designator R33)
R34_CHANNEL1 "90.9k" R2512 56.5,112.25 r90 bottom (schematic designator R34)
R34_CHANNEL2 "90.9k" R2512 111.5,112.25 r90 bottom (schematic designator R34)
R34_CHANNEL3 "90.9k" R2512 165.5,112.25 r90 bottom (schematic designator R34)
R34_CHANNEL4 "90.9k" R2512 220.5,112.25 r90 bottom (schematic designator R34)
R35 "49.9" R0603 57.25,31.75 r180 bottom
R36 "49.9" R0603 54.317,24.575 r270 bottom
R37 "49.9" R0603 52.883,24.575 r270 bottom
R38 "49.9" R0603 51.45,24.575 r270 bottom
R39 "680" R0603 46.6,45.675 r270 top
R40 "18k" R0603 50.75,36.875 r0 top
R41 "680" R0603 44.975,46.175 r270 top
R42 "10k" R0603 45.925,49.45 r180 top
R43 "1M/1W" RES1016-650X250 229.725,38.625 r0 top
R44 "1k" R0603 136.225,29.375 r90 top
R45 "120k" R0603 137.875,24.775 r0 top
R46 "51k" R0603 169.05,42.6 r0 top
R47 "50k" "T910W (3296W)" 132.725,26.05 r270 top
R48 "10k" R0603 167.825,46.25 r270 top
R49 "120k" R0603 140.05,29.75 r180 top
R50 "10k" R0603 159.625,36 r270 top
S1 "EC12D" EC12D 99.45,17.65 r0 top
T1_CHANNEL1 "EI 302 2027" "EI 302 2027" 62.705,94.648 r270 top (schematic designator T1)
T1_CHANNEL2 "EI 302 2027" "EI 302 2027" 117.705,94.648 r270 top (schematic designator T1)
T1_CHANNEL3 "EI 302 2027" "EI 302 2027" 171.705,94.648 r270 top (schematic designator T1)
T1_CHANNEL4 "EI 302 2027" "EI 302 2027" 226.705,94.648 r270 top (schematic designator T1)
Th1 "" "TH D13 7.5b" 240.15,33.275 r90 top
U1 "STM32F334Сx" LQFP48 102,58.225 r90 top
U2 "MCP6004" TSSOP-14 141.825,59.375 r0 top
U3_CHANNEL1 "HCNR201" HCNR201 61.145,99.839 r270 bottom (schematic designator U3)
U3_CHANNEL2 "HCNR201" HCNR201 116.145,99.839 r270 bottom (schematic designator U3)
U3_CHANNEL3 "HCNR201" HCNR201 170.145,99.839 r270 bottom (schematic designator U3)
U3_CHANNEL4 "HCNR201" HCNR201 225.145,99.839 r270 bottom (schematic designator U3)
U4_CHANNEL1 "TL072" SO8-150 66.917,107.692 r270 bottom (schematic designator U4)
U4_CHANNEL2 "TL072" SO8-150 121.917,107.692 r270 bottom (schematic designator U4)
U4_CHANNEL3 "TL072" SO8-150 175.917,107.692 r270 bottom (schematic designator U4)
U4_CHANNEL4 "TL072" SO8-150 230.917,107.692 r270 bottom (schematic designator U4)
U5_CHANNEL1 "TL431" SOT23 49.022,108.204 r90 bottom (schematic designator U5)
U5_CHANNEL2 "TL431" SOT23 104.022,108.204 r90 bottom (schematic designator U5)
U5_CHANNEL3 "TL431" SOT23 158.022,108.204 r90 bottom (schematic designator U5)
U5_CHANNEL4 "TL431" SOT23 213.022,108.204 r90 bottom (schematic designator U5)
U6_CHANNEL1 "IR4427S" SO8-150 62.611,69.215 r0 top (schematic designator U6)
U6_CHANNEL2 "IR4427S" SO8-150 117.611,69.215 r0 top (schematic designator U6)
U6_CHANNEL3 "IR4427S" SO8-150 171.611,69.215 r0 top (schematic designator U6)
U6_CHANNEL4 "IR4427S" SO8-150 226.611,69.215 r0 top (schematic designator U6)
U7_CHANNEL1 "L78L08" SO8-150 29.353,111.252 r90 top (schematic designator U7)
U7_CHANNEL2 "L78L08" SO8-150 84.353,111.252 r90 top (schematic designator U7)
U7_CHANNEL3 "L78L08" SO8-150 138.353,111.252 r90 top (schematic designator U7)
U7_CHANNEL4 "L78L08" SO8-150 193.353,111.252 r90 top (schematic designator U7)
U8_CHANNEL1 "A1212S-2W" AxxyyS-2W 43.815,81.915 r180 top (schematic designator U8)
U8_CHANNEL2 "A1212S-2W" AxxyyS-2W 98.815,81.915 r180 top (schematic designator U8)
U8_CHANNEL3 "A1212S-2W" AxxyyS-2W 152.815,81.915 r180 top (schematic designator U8)
U8_CHANNEL4 "A1212S-2W" AxxyyS-2W 207.815,81.915 r180 top (schematic designator U8)
U9_CHANNEL1 "L79L08" SO8-150 38.219,111.252 r90 top (schematic designator U9)
U9_CHANNEL2 "L79L08" SO8-150 93.219,111.252 r90 top (schematic designator U9)
U9_CHANNEL3 "L79L08" SO8-150 147.219,111.252 r90 top (schematic designator U9)
U9_CHANNEL4 "L79L08" SO8-150 202.219,111.252 r90 top (schematic designator U9)
U10 "CH9121" LQFP64 54.775,44.675 r90 top
U11 "LD1117-1.8V" SOT223 72.15,41.525 r0 top value=1.8V
U12 "HE12P24-LNR" HExxPyy-LRN 205.5,50.5 r270 top
U13 "MCP16301/H" SOT23-6 171,47 r0 top
U14 "TL431" SOT23 141.325,27.275 r0 top
U15 "LD1117-3.3V" SOT223 153.875,34.525 r180 top value=3.3V
VD1 "BAT54WS" SOD323 97.625,52.3 r0 top
VD2 "BAT54WS" SOD323 118.125,57.3 r180 top
VD3_CHANNEL1 "1N4148WS" SOD323 66.425,73.75 r180 top (schematic designator VD3)
VD3_CHANNEL2 "1N4148WS" SOD323 121.425,73.75 r180 top (schematic designator VD3)
VD3_CHANNEL3 "1N4148WS" SOD323 175.425,73.75 r180 top (schematic designator VD3)
VD3_CHANNEL4 "1N4148WS" SOD323 230.425,73.75 r180 top (schematic designator VD3)
VD4_CHANNEL1 "1N4148WS" SOD323 57.658,72.39 r0 top (schematic designator VD4)
VD4_CHANNEL2 "1N4148WS" SOD323 112.658,72.39 r0 top (schematic designator VD4)
VD4_CHANNEL3 "1N4148WS" SOD323 166.658,72.39 r0 top (schematic designator VD4)
VD4_CHANNEL4 "1N4148WS" SOD323 221.658,72.39 r0 top (schematic designator VD4)
VD5 "1N4148WS" SOD323 167.25,49.475 r0 top
VD6 "SS16" "DO-214AC (SMA)" 174.75,50.25 r270 top
VD7 "LED" SMD_0805_GREEN 159.625,32.4 r90 top
VD8 "BZV55-3.6V" SOD80C 136.25,33.975 r270 top
Vr1 "*" VAR-10K-5.6 228.4,33.775 r0 top
VT1 "BSS84" SOT23 80.1,57.25 r0 top
VT2_CHANNEL1 "AON6294" DFN5x6 72.644,76.714 r0 top (schematic designator VT2)
VT2_CHANNEL2 "AON6294" DFN5x6 127.644,76.714 r0 top (schematic designator VT2)
VT2_CHANNEL3 "AON6294" DFN5x6 181.644,76.714 r0 top (schematic designator VT2)
VT2_CHANNEL4 "AON6294" DFN5x6 236.644,76.714 r0 top (schematic designator VT2)
VT3_CHANNEL1 "AON6294" DFN5x6 52.705,76.747 r0 top (schematic designator VT3)
VT3_CHANNEL2 "AON6294" DFN5x6 107.705,76.747 r0 top (schematic designator VT3)
VT3_CHANNEL3 "AON6294" DFN5x6 161.705,76.747 r0 top (schematic designator VT3)
VT3_CHANNEL4 "AON6294" DFN5x6 216.705,76.747 r0 top (schematic designator VT3)

## Footprints (in the part's own frame and the unit in brackets; to place one, negate y for a bottom-side part, rotate by r counter-clockwise, add the part's x,y. Pads: shape width x height; smd on the part's side, far side on the other; paste and mask are expansions set on the pad)
"562 Series" [mm] "Littelfuse 562 Series (56200001009)"
  round 1.5 hole 0.7: 1(-2.54,0) 2(2.58,0)
  silkscreen extent -3.9,-1.3 3.9,1.3, body extent -3.83,-1.28 3.83,1.28, height 4.65
AxxyyS-2W [mm]
  round 1.5 hole 0.75: 1(0,0) 2(2.54,0) 4(7.62,0) 5(10.16,0) 6(12.7,0)
  silkscreen extent -1.9,-6.1 17.7,0.9, body extent -2,-6.11 17.6,0.9, height 10
BH810 [mm]
  round 1.75 hole 1: 1(0,0) 2(0,-20)
  silkscreen extent -11.4,-25.8 11.4,2, body extent -11.5,-25.61 11.5,2.39, height 8.5
C0603(1608) [mm]
  rrect50% 0.8x0.75 smd: 1(-0.75,0) 2(0.75,0)
  silkscreen extent -1.45,-0.65 1.45,0.65, body extent -0.8,-0.4 0.8,0.4, height 0.3
C1206(3216) [mm]
  rrect50% 1x1.6 smd: 1(-1.5,0) 2(1.5,0)
  silkscreen extent -2.3,-1.05 2.3,1.05, body extent -1.6,-0.8 1.6,0.8, height 1
CDRH6D28 [mm] "SMD Power Inductor, Body 7.00x7.00x3.00mm"
  rect 2.9x7.1 smd: 1(-2.7,0) 2(2.7,0)
  silkscreen extent -0.85,-3.5 0.85,3.5, body extent -3.35,-3.35 3.35,3.35, height 3.2
DFN5x6 [mm]
  rect 0.5x0.75 smd: 1(1.905,-2.8) 3(-1.905,-2.8) 3(-0.635,-2.8) 3(0.635,-2.8)
  rrect10% 4.6x4.9 smd: 2(0,0.85)
  silkscreen extent 2.34,-2.03 2.44,-1.93, body extent -2.57,-3.07 2.58,3.07, height 1.13
DG128-5.0-02P [mm]
  rect 3x3 hole 1.3: 1(-2.5,0)
  round 3 hole 1.3: 2(2.5,0)
  silkscreen extent -5.5,-5.25 5,5, body extent -5.6,-5.3 5,5, height 14.25
DG128-5.0-03P [mm]
  rect 3x3 hole 1.3: 1(-5,0)
  round 3 hole 1.3: 2(0,0) 3(5,0)
  silkscreen extent -8,-5.25 7.5,5, body extent -8.1,-5.3 7.5,5, height 14.25
"DO-214AC (SMA)" [mil] "DO-214-AC/SMA; 2 C-Bend Leads; Body 5 x 2.7 mm, inc. leads (LxW)"
  rrect50% 70x70 smd: 1(-85,0) 2(85,0)
  silkscreen extent -138,-60 134,60, body extent -98,-53 98,53, height 85
DR331 [mm]
  rect 2.2x1.2 smd: 1(-0.5,0) 2(-0.5,-2.54) 3(7.9,-2.54) 4(7.9,0)
  silkscreen extent -0.55,-4.06 8.3,1.52, body extent -0.77,-3.97 8.23,1.43, height 4.95
DR-CW8A [mm]
  round 2 hole 1: 1(-2.54,0) 2(2.54,0)
  silkscreen extent -4.5,-4.5 4.5,4.5, body extent -4.5,-4.5 4.5,4.5, height 13.27
EC12D [mm]
  rrect50% 3.5x3.5 hole 2.05 square: 0(-5.55,0) 0(5.55,0)
  round 2 hole 1.05: A(-5.55,4.15) B(5.55,4.15) C(-5.55,-4.15) D(5.95,-3.45) E(0,6.85)
  silkscreen extent -6.6,-5.94 6.59,6.79, body extent -7.07,-5.96 7.08,7, height 17.47
"EI 302 2027" [mm]
  round 2 hole 1: 1(-10,-10) 5(-10,10) 6(10,10) 7(10,5) 9(10,-5) 10(10,-10)
  silkscreen extent -13.75,-16.25 13.75,16.25, body extent -13.75,-16.25 13.75,16.25, height 21.8
"EL Case A (3216-18)" [mm] "Capacitor, SM Tantalum; Body 3.2 x 1.6 mm (LxW typ)"
  rrect25% 1.65x1.4 smd: 1(-1.525,0) 2(1.525,0)
  silkscreen extent -3.3,-1.2 2.8,1.1, body extent -1.83,-0.9 1.81,0.9, height 1.8
El-d10-h16-F5-0.6 [mm]
  oct 1.25x1.25 hole 0.7: 1(2.5,0)
  round 1.25 hole 0.7: 2(-2.5,0)
  silkscreen extent -5,-5 5,5, body extent -5.05,-5 5,5, height 16.15
El-d13-h25-F5-0.6 [mm]
  oct 1.25x1.25 hole 0.7: 1(2.5,0)
  round 1.25 hole 0.7: 2(-2.5,0)
  silkscreen extent -6.5,-6.5 6.5,6.5, body extent -6.5,-6.5 6.5,6.5, height 25.1
HCNR201 [mm]
  rect 1.5x1.3 smd: 1(0,0) 2(0,-2.54) 3(0,-5.08) 4(0,-7.62) 5(11.43,-7.62) 6(11.43,-5.08) 7(11.43,-2.54) 8(11.43,0)
  silkscreen extent 1.21,-9.55 10.22,1.95, body extent -0.45,-9.37 11.85,1.78, height 4.75
HExxPyy-LRN [mm]
  rect 2x2 hole 1: 1(-6.75,2.54)
  round 2 hole 1: 2(-6.75,-2.54) 3(13.57,5.08) 4(13.57,-5.08)
  silkscreen extent -19.75,-12.75 19.75,12.75, body extent -19.75,-12.55 19.75,12.95, height 22.01
HR911105A [mm]
  round 1.2 hole 0.7: 1(8.89,2.54) 2(7.62,0) 3(6.35,2.54) 4(5.08,0) 5(3.81,2.54) 6(2.54,0) 7(1.27,2.54) 8(0,0)
  round 2 hole 1.02: 9(11.075,13.79) 10(8.535,13.79) 11(0.355,13.79) 12(-2.185,13.79)
  round 2.5 hole 1.63: 13(-3.43,5.8) 13(12.32,5.8)
  round 3.2 hole 3.2 unplated: ""(-1.27,8.89) ""(10.16,8.89)
  silkscreen extent -3.55,-1.73 12.44,19.69, body extent -3.46,-1.6 12.41,19.8, height 13.5
KX-7T [mm]
  rect 1.5x1.3 smd: 1(-1.25,-1) 2(1.25,-1) 3(1.25,1) 4(-1.25,1)
  silkscreen extent -1.85,-1.5 1.85,1.5, body extent -1.61,-1.25 1.61,1.25, height 0.81
KX-327S [mm]
  rect 1.3x1.9 smd: 1(-2.75,-1.6) 2(2.75,1.6) 3(2.75,-1.6) 4(-2.75,1.6)
  silkscreen extent -4,-1.9 4,1.9, body extent -4,-1.85 4,1.85, height 2.5
LQFP48 [mm] "48-Leads, Body 7x7mm, Pitch 0.5mm"
  oval 1.2x0.3 smd mask+0.05: 1(-4.25,2.75) 2(-4.25,2.25) 3(-4.25,1.75) 4(-4.25,1.25) 5(-4.25,0.75) 6(-4.25,0.25) 7(-4.25,-0.25) 8(-4.25,-0.75) 9(-4.25,-1.25) 10(-4.25,-1.75) 11(-4.25,-2.25) 12(-4.25,-2.75) 25(4.25,-2.75) 26(4.25,-2.25) 27(4.25,-1.75) 28(4.25,-1.25) 29(4.25,-0.75) 30(4.25,-0.25) 31(4.25,0.25) 32(4.25,0.75) 33(4.25,1.25) 34(4.25,1.75) 35(4.25,2.25) 36(4.25,2.75)
  oval 0.3x1.2 smd mask+0.05: 13(-2.75,-4.25) 14(-2.25,-4.25) 15(-1.75,-4.25) 16(-1.25,-4.25) 17(-0.75,-4.25) 18(-0.25,-4.25) 19(0.25,-4.25) 20(0.75,-4.25) 21(1.25,-4.25) 22(1.75,-4.25) 23(2.25,-4.25) 24(2.75,-4.25) 37(2.75,4.25) 38(2.25,4.25) 39(1.75,4.25) 40(1.25,4.25) 41(0.75,4.25) 42(0.25,4.25) 43(-0.25,4.25) 44(-0.75,4.25) 45(-1.25,4.25) 46(-1.75,4.25) 47(-2.25,4.25) 48(-2.75,4.25)
  silkscreen extent -3.97,-3.18 3.18,3.97, body extent -4.39,-4.39 4.39,4.39, height 1.55
LQFP64 [mm] "64-Leads, Body 10x10mm, Pitch 0.5mm"
  oval 1.2x0.3 smd mask+0.05: 1(-6,3.75) 2(-6,3.25) 3(-6,2.75) 4(-6,2.25) 5(-6,1.75) 6(-6,1.25) 7(-6,0.75) 8(-6,0.25) 9(-6,-0.25) 10(-6,-0.75) 11(-6,-1.25) 12(-6,-1.75) 13(-6,-2.25) 14(-6,-2.75) 15(-6,-3.25) 16(-6,-3.75) 33(6,-3.75) 34(6,-3.25) 35(6,-2.75) 36(6,-2.25) 37(6,-1.75) 38(6,-1.25) 39(6,-0.75) 40(6,-0.25) 41(6,0.25) 42(6,0.75) 43(6,1.25) 44(6,1.75) 45(6,2.25) 46(6,2.75) 47(6,3.25) 48(6,3.75)
  oval 0.3x1.2 smd mask+0.05: 17(-3.75,-6) 18(-3.25,-6) 19(-2.75,-6) 20(-2.25,-6) 21(-1.75,-6) 22(-1.25,-6) 23(-0.75,-6) 24(-0.25,-6) 25(0.25,-6) 26(0.75,-6) 27(1.25,-6) 28(1.75,-6) 29(2.25,-6) 30(2.75,-6) 31(3.25,-6) 32(3.75,-6) 49(3.75,6) 50(3.25,6) 51(2.75,6) 52(2.25,6) 53(1.75,6) 54(1.25,6) 55(0.75,6) 56(0.25,6) 57(-0.25,6) 58(-0.75,6) 59(-1.25,6) 60(-1.75,6) 61(-2.25,6) 62(-2.75,6) 63(-3.25,6) 64(-3.75,6)
  silkscreen extent -5.42,-4.35 4.35,5.4, body extent -6.1,-6.07 6.04,6.07, height 1.62
LQH32CN [mm]
  rect 2x2.5 smd: 1(-1.5,0) 2(1.5,0)
  silkscreen extent -0.75,-1.5 0.77,1.5, body extent -1.6,-1.35 1.6,1.35, height 2
"MER 13x5.5 h10 R10.16" [mm]
  round 2.5 hole 1.2: 1(-5.08,0) 2(5.08,0)
  silkscreen extent -6.5,-2.75 6.46,2.75, body extent -6.5,-2.75 6.5,2.75, height 11
PLS-1 [mm]
  rect 1.8x1.8 hole 1: 1(0,0)
  silkscreen extent -1.27,-1.27 1.27,1.27, body extent -1.27,-1.27 1.27,1.27, height 10.1
PLS-2 [mm]
  rect 1.8x1.8 hole 1: 1(-1.27,0)
  round 1.8 hole 1: 2(1.27,0)
  silkscreen extent -2.54,-1.27 2.54,1.27, body extent -2.54,-1.27 2.54,1.27, height 10.1
PLS-14 [mm]
  rect 1.8x1.8 hole 1: 1(-16.51,0)
  round 1.8 hole 1: 2(-13.97,0) 3(-11.43,0) 4(-8.89,0) 5(-6.35,0) 6(-3.81,0) 7(-1.27,0) 8(1.27,0) 9(3.81,0) 10(6.35,0) 11(8.89,0) 12(11.43,0) 13(13.97,0) 14(16.51,0)
  silkscreen extent -17.78,-1.27 17.78,1.27, body extent -17.78,-1.27 17.78,1.27, height 10.1
PMCU-0330 [mm]
  round 1.75 hole 1: 1(-5,6.5) 2(-5,-6.5) 3(5,-6.5) 4(5,6.5)
  silkscreen extent -9.65,-8.64 9.65,8.64, body extent -9.2,-8.25 9.2,8.26, height 21.7
R0603 [mm]
  rrect50% 0.8x0.75 smd: 1(-0.75,0) 2(0.75,0)
  silkscreen extent -1.4,-0.6 1.4,0.6, body extent -0.8,-0.4 0.8,0.4, height 0.45
R1206 [mm]
  rrect50% 1x1.6 smd: 1(-1.5,0) 2(1.5,0)
  silkscreen extent -2.3,-1.1 2.3,1.1, body extent -1.6,-0.8 1.6,0.8, height 0.6
R2512 [mm]
  rrect50% 1.8x3.2 smd: 1(-2.8,0) 2(2.8,0)
  silkscreen extent -4,-1.9 4,1.9, body extent -3.16,-1.6 3.16,1.6, height 0.62
RES1016-650X250 [mm] "Resistor, Axial, Pad spacing 10.16 mm - Body Lengh 6.5mm X Body Diameter 2.5mm"
  round 1.6 hole 0.9: 1(-5.08,0) 2(5.08,0)
  silkscreen extent -3.95,-1.25 3.95,1.25, body extent -5.38,-1.27 5.38,1.26, height 2.51
SM06B-SRSS-TB [mm] "Pitch 1mm"
  rect 0.7x1.8 smd: 0(-3.78,3.875) 0(3.78,3.875)
  rect 0.6x1.55 smd: 1(2.5,0) 2(1.5,0) 3(0.5,0) 4(-0.5,0) 5(-1.5,0) 6(-2.5,0)
  silkscreen extent -4,-0.2 4,4.75, body extent -4,-0.2 4,4.75, height 2.9
SMD_0805_GREEN [mm]
  rrect50% 1x1.2 smd: 1(-1,0) 2(1,0)
  silkscreen extent 1.8,-0.6 1.8,0.6, body extent -1.01,-0.62 1.01,0.63, height 1.1
SO8-150 [mil]
  rect 24x50 smd mask+4: 1(-75,-105)
  rrect50% 24x52 smd mask+4: 2(-25,-105) 3(25,-105) 4(75,-105) 5(75,105) 6(25,105) 7(-25,105) 8(-75,105)
  silkscreen extent -95,-62 95,61, body extent -95,-122 95,122, height 67
SOD80C [mil]
  rrect50% 55x60 smd: 1(-70,0) 2(70,0)
  silkscreen extent -108,-41 114,40, body extent -69,-28 69,27, height 55
SOD323 [mm]
  rrect50% 0.8x0.6 smd: 1(-1.2,0) 2(1.2,0)
  silkscreen extent 1.85,-0.45 1.85,0.45, body extent -1.3,-0.69 1.3,0.66, height 1.1
SOT23 [mm] "SOT23, 3-Leads, Body 2.9x1.3mm, Pitch 0.95mm, Lead Span 2.5mm"
  rrect50% 0.65x1 smd: 1(-0.95,-1) 2(0.95,-1) 3(0,1)
  silkscreen extent -1.6,-1.05 1.5,0.75, body extent -1.46,-1.25 1.46,1.22, height 1
SOT23-6 [mm]
  rect 1.1x0.6 smd: 1(-1.4,0.95) 2(-1.4,0) 3(-1.4,-0.95) 4(1.4,-0.95) 5(1.4,0) 6(1.4,0.95)
  silkscreen extent -0.9,-1.55 0.5,1.67, body extent -1.4,-1.45 1.4,1.45, height 1.45
SOT223 [mm] "SOT-223/SC-73; 4 Leads; Body 6.7 x 7.3 mm, inc. leads (LxW max)"
  rrect50% 1.05x1.75 smd: 1(-2.3,-3.3) 2(0,-3.3) 3(2.3,-3.3)
  rrect50% 3.4x1.75 smd: 4(0,3.3)
  silkscreen extent -3.35,-2.42 3.35,1.85, body extent -3.25,-3.5 3.25,3.5, height 1.64
"T910W (3296W)" [mm]
  round 1.2 hole 0.6: 1(-2.54,0) 2(0,0) 3(2.54,0)
  silkscreen extent -4.75,-2.4 4.8,2.4, body extent -4.76,-2.42 4.77,2.41, height 11.55
"TH D13 7.5b" [mm]
  round 2 hole 1: 1(-3.75,0) 2(3.75,0)
  silkscreen extent -7.49,-3.43 7.49,3.56, body extent -7.5,-3.5 7.5,3.5, height 22.5
TSSOP-14 [mm]
  rect 1.45x0.45 smd: 1(0,0) 2(0,-0.65) 3(0,-1.3) 4(0,-1.95) 5(0,-2.6) 6(0,-3.25) 7(0,-3.9) 8(5.8,-3.9) 9(5.8,-3.25) 10(5.8,-2.6) 11(5.8,-1.95) 12(5.8,-1.3) 13(5.8,-0.65) 14(5.8,0)
  silkscreen extent 0.2,-4.5 5,0.7, body extent -0.3,-4.45 6.1,0.55, height 1.2
VAR-10K-5.6 [mm]
  round 2 hole 1: 1(-3.75,1.25) 2(3.75,-1.25)
  silkscreen extent -6.25,-2.85 6.25,2.85, body extent -6.25,-2.8 6.25,2.8, height 16.05

## Part data
B1: library part "Battery Holder", "Battery holder CR2032 (3.3В)"
C1 C2 C3 C4 C5 C6 C7 C8 C9 C10 C11 C12 C13_CHANNEL1 C13_CHANNEL2 C13_CHANNEL3 C13_CHANNEL4 C14_CHANNEL1 C14_CHANNEL2 C14_CHANNEL3 C14_CHANNEL4 C15_CHANNEL1 C15_CHANNEL2 C15_CHANNEL3 C15_CHANNEL4 C16_CHANNEL1 C16_CHANNEL2 C16_CHANNEL3 C16_CHANNEL4 C20_CHANNEL1 C20_CHANNEL2 C20_CHANNEL3 C20_CHANNEL4 C22_CHANNEL1 C22_CHANNEL2 C22_CHANNEL3 C22_CHANNEL4 C24_CHANNEL1 C24_CHANNEL2 C24_CHANNEL3 C24_CHANNEL4 C27_CHANNEL1 C27_CHANNEL2 C27_CHANNEL3 C27_CHANNEL4 C28_CHANNEL1 C28_CHANNEL2 C28_CHANNEL3 C28_CHANNEL4 C30_CHANNEL1 C30_CHANNEL2 C30_CHANNEL3 C30_CHANNEL4 C32_CHANNEL1 C32_CHANNEL2 C32_CHANNEL3 C32_CHANNEL4 C34 C35 C36 C37 C38 C40 C42 C43 C50 C51 C54 C55 C59 C60 C61: library part "Capasitor SMD"
C17_CHANNEL1 C17_CHANNEL2 C17_CHANNEL3 C17_CHANNEL4: library part "Capasitor TECAP", "10uF 16V Tantalum capasitor in Case-A", Voltage=16V
C18_CHANNEL1 C18_CHANNEL2 C18_CHANNEL3 C18_CHANNEL4 C19_CHANNEL1 C19_CHANNEL2 C19_CHANNEL3 C19_CHANNEL4: library part "Capasitor SMD", "Multilayer Ceramic Capacitors MLCC - SMD/SMT"
C21_CHANNEL1 C21_CHANNEL2 C21_CHANNEL3 C21_CHANNEL4 C23_CHANNEL1 C23_CHANNEL2 C23_CHANNEL3 C23_CHANNEL4 C25_CHANNEL1 C25_CHANNEL2 C25_CHANNEL3 C25_CHANNEL4 C26_CHANNEL1 C26_CHANNEL2 C26_CHANNEL3 C26_CHANNEL4 C29_CHANNEL1 C29_CHANNEL2 C29_CHANNEL3 C29_CHANNEL4 C31_CHANNEL1 C31_CHANNEL2 C31_CHANNEL3 C31_CHANNEL4 C33_CHANNEL1 C33_CHANNEL2 C33_CHANNEL3 C33_CHANNEL4 C39 C41 C56: library part "Capasitor TECAP", Voltage=6.3V, Model=293D107X9010D2TE3
C44: library part Capasitor, Voltage=275V
C45 C46: library part "Capasitor POL", Voltage=25V, Model="ECAP 2200/6.3V 1020 105'C"
C47: library part "Capasitor TECAP", Voltage=25V, Model=293D227X96R3C2TE3
C48 C49: library part Capasitor, Voltage=1.5kV
C52 C57: library part "Capasitor POL", Voltage=16V, Model="ECAP 1000/16V 1016 105°C"
C53 C58: library part "Capasitor TECAP", Voltage=16V, Model=TAJA106K016RNJ
F1: library part Fuse
L1 L2_CHANNEL1 L2_CHANNEL2 L2_CHANNEL3 L2_CHANNEL4 L3_CHANNEL1 L3_CHANNEL2 L3_CHANNEL3 L3_CHANNEL4 L6: library part "Chocke Inductor"
  L1 L2_CHANNEL1 L2_CHANNEL2 L2_CHANNEL3 L2_CHANNEL4 L3_CHANNEL1 L3_CHANNEL2 L3_CHANNEL3 L3_CHANNEL4: Model=DR331-513AE
L4 L5 L7: library part Inductor
  L4: Model=CDRH4D28NP-2R2NC
P4 P5 P7: "20A/300V AC 5mm"
P6: "Разъем RJ-45 на плату (HR911105A)"
Q1 Q2 Q3: library part XTAL
R1 R2 R4 R6 R8 R9 R10 R12 R13 R14 R15 R16 R17_CHANNEL1 R17_CHANNEL2 R17_CHANNEL3 R17_CHANNEL4 R18_CHANNEL1 R18_CHANNEL2 R18_CHANNEL3 R18_CHANNEL4 R19_CHANNEL1 R19_CHANNEL2 R19_CHANNEL3 R19_CHANNEL4 R21_CHANNEL1 R21_CHANNEL2 R21_CHANNEL3 R21_CHANNEL4 R22_CHANNEL1 R22_CHANNEL2 R22_CHANNEL3 R22_CHANNEL4 R26_CHANNEL1 R26_CHANNEL2 R26_CHANNEL3 R26_CHANNEL4 R28_CHANNEL1 R28_CHANNEL2 R28_CHANNEL3 R28_CHANNEL4 R29_CHANNEL1 R29_CHANNEL2 R29_CHANNEL3 R29_CHANNEL4 R30_CHANNEL1 R30_CHANNEL2 R30_CHANNEL3 R30_CHANNEL4 R34_CHANNEL1 R34_CHANNEL2 R34_CHANNEL3 R34_CHANNEL4 R35 R36 R37 R38 R39 R40 R41 R42 R44 R45 R46 R48 R49 R50: library part "Resistor SMD"
  R4 R6 R8 R12 R17_CHANNEL1 R17_CHANNEL2 R17_CHANNEL3 R17_CHANNEL4 R18_CHANNEL1 R18_CHANNEL2 R18_CHANNEL3 R18_CHANNEL4 R40 R45 R49: Accuracy=1%
  R26_CHANNEL1 R26_CHANNEL2 R26_CHANNEL3 R26_CHANNEL4 R28_CHANNEL1 R28_CHANNEL2 R28_CHANNEL3 R28_CHANNEL4 R29_CHANNEL1 R29_CHANNEL2 R29_CHANNEL3 R29_CHANNEL4 R30_CHANNEL1 R30_CHANNEL2 R30_CHANNEL3 R30_CHANNEL4 R34_CHANNEL1 R34_CHANNEL2 R34_CHANNEL3 R34_CHANNEL4: Accuracy=0.1%
R3 R5 R7 R11 R20_CHANNEL1 R20_CHANNEL2 R20_CHANNEL3 R20_CHANNEL4 R47: library part "Trimming Resistor", Set Position=0.5
R23_CHANNEL1 R23_CHANNEL2 R23_CHANNEL3 R23_CHANNEL4 R24_CHANNEL1 R24_CHANNEL2 R24_CHANNEL3 R24_CHANNEL4 R25_CHANNEL1 R25_CHANNEL2 R25_CHANNEL3 R25_CHANNEL4 R27_CHANNEL1 R27_CHANNEL2 R27_CHANNEL3 R27_CHANNEL4 R31_CHANNEL1 R31_CHANNEL2 R31_CHANNEL3 R31_CHANNEL4 R32_CHANNEL1 R32_CHANNEL2 R32_CHANNEL3 R32_CHANNEL4 R33_CHANNEL1 R33_CHANNEL2 R33_CHANNEL3 R33_CHANNEL4: library part "Resistor SMD", "Thick Film Resistors - SMD"
R43: library part "Resistor THD"
S1: library part "Encoder with switch"
T1_CHANNEL1 T1_CHANNEL2 T1_CHANNEL3 T1_CHANNEL4: library part "EI 30"
Th1: library part Thermistor
U1: library part STM32F334Cx, "ARM Cortex-M4 series Microcontroller IC 32-Bit 72MHz 16KB (16K x 8) FLASH 48-LQFP (7x7)"
U2: "Low cost, low power, input/output rail-to-rail operational amplifiers. 1.8 - 6V, 1MHz, 100uA"
U4_CHANNEL1 U4_CHANNEL2 U4_CHANNEL3 U4_CHANNEL4: "FET 6mV 3MHz 13V/us 2.8mA"
U5_CHANNEL1 U5_CHANNEL2 U5_CHANNEL3 U5_CHANNEL4 U14: "Precision Low noise Variable \"Zener\". Vin up to 36V, 0.2Ohm output impedance. Sink-current 1 - 100mA. Reference voltage - 2.495V"
U6_CHANNEL1 U6_CHANNEL2 U6_CHANNEL3 U6_CHANNEL4: "Dual Low Side Driver"
U7_CHANNEL1 U7_CHANNEL2 U7_CHANNEL3 U7_CHANNEL4: library part L78Lxx
U8_CHANNEL1 U8_CHANNEL2 U8_CHANNEL3 U8_CHANNEL4: library part AxxyyS-1W, Power=2, In=12, Out=12
U9_CHANNEL1 U9_CHANNEL2 U9_CHANNEL3 U9_CHANNEL4: library part L79Lxx
U10: "Network and UART Transparent Transmission Chip", Device=LAN8720A
U11 U15: library part LD1117
VD1 VD2: "SOD323 Schottky 30V 230mA"
VD3_CHANNEL1 VD3_CHANNEL2 VD3_CHANNEL3 VD3_CHANNEL4 VD4_CHANNEL1 VD4_CHANNEL2 VD4_CHANNEL3 VD4_CHANNEL4 VD5: "SOD323 100V 200mA"
VD6: "SMA (DO214AC) Schottky 60V 1A"
VD8: library part BZV55, "SOD80C 250mA", Voltage=3.6V
Vr1: library part Varistor
VT1: "P-MOS -50V 1.2(10.0)Ω -130(520)mA"
VT2_CHANNEL1 VT2_CHANNEL2 VT2_CHANNEL3 VT2_CHANNEL4 VT3_CHANNEL1 VT3_CHANNEL2 VT3_CHANNEL3 VT3_CHANNEL4: "N-MOS 100V 10(14)mΩ 33(52)A"
U12: In=~220V, Out=12.0V/24W

## Via types
v1: diameter 0.8, hole 0.4, Top Layer to Bottom Layer, 99 vias
v2: diameter 0.5, hole 0.3, Top Layer to Bottom Layer, 49 vias
v3: diameter 1, hole 0.6, Top Layer to Bottom Layer, 22 vias

## Nets (pads, with @x,y where several pads share a name; then routed paths per layer and width w, separated by ;. In a path a pad name is that pad's centre, name@x,y a point inside that pad or via, vN(x,y) a via of type N, cw(c..) or ccw(c..) an arc to the next point about the centre after c; other vN are vias at no path point)
(+8V)_CHANNEL1: C13_CHANNEL1.2 C22_CHANNEL1.2 C23_CHANNEL1.1 U3_CHANNEL1.2 U4_CHANNEL1.8 U7_CHANNEL1.1 | length 57.7
  Top Layer w0.5: U7_CHANNEL1.1@32.01,109.337 U7_CHANNEL1.1@32.02,109.347 33.497,109.347 33.45,109.3 v1(33.45,107.875) C23_CHANNEL1.1@33.45,105.825 C23_CHANNEL1.1@33.021,106.254
  Top Layer w1: v1(62.95,111.2) 62.95,111.15 65.25,108.85 65.25,103.15 63.975,101.875 v1(63.675,101.875)
  Bottom Layer w0.5: v1(62.95,111.2) 62.964,111.186 64.26,111.186 C13_CHANNEL1.2@64.274,111.172 64.262,111.16 64.262,109.609 U4_CHANNEL1.8@64.25,109.597
  Bottom Layer w1: v1(33.45,107.875) 43.725,97.6 62.35,97.6 63.535,98.785 63.535,99.689 U3_CHANNEL1.2@63.685,99.839 63.685,101.865 v1(63.675,101.875)